# Altium PCB PCB1.PcbDoc
Units mm, origin at the board's own origin, x right, y up, seen from the top; angles counter-clockwise.
Board outline 49.28 x 64.77 mm, 2 copper layers (Top Layer, Bottom Layer); 24 components, 17 nets, 77 pads, 1 vias.
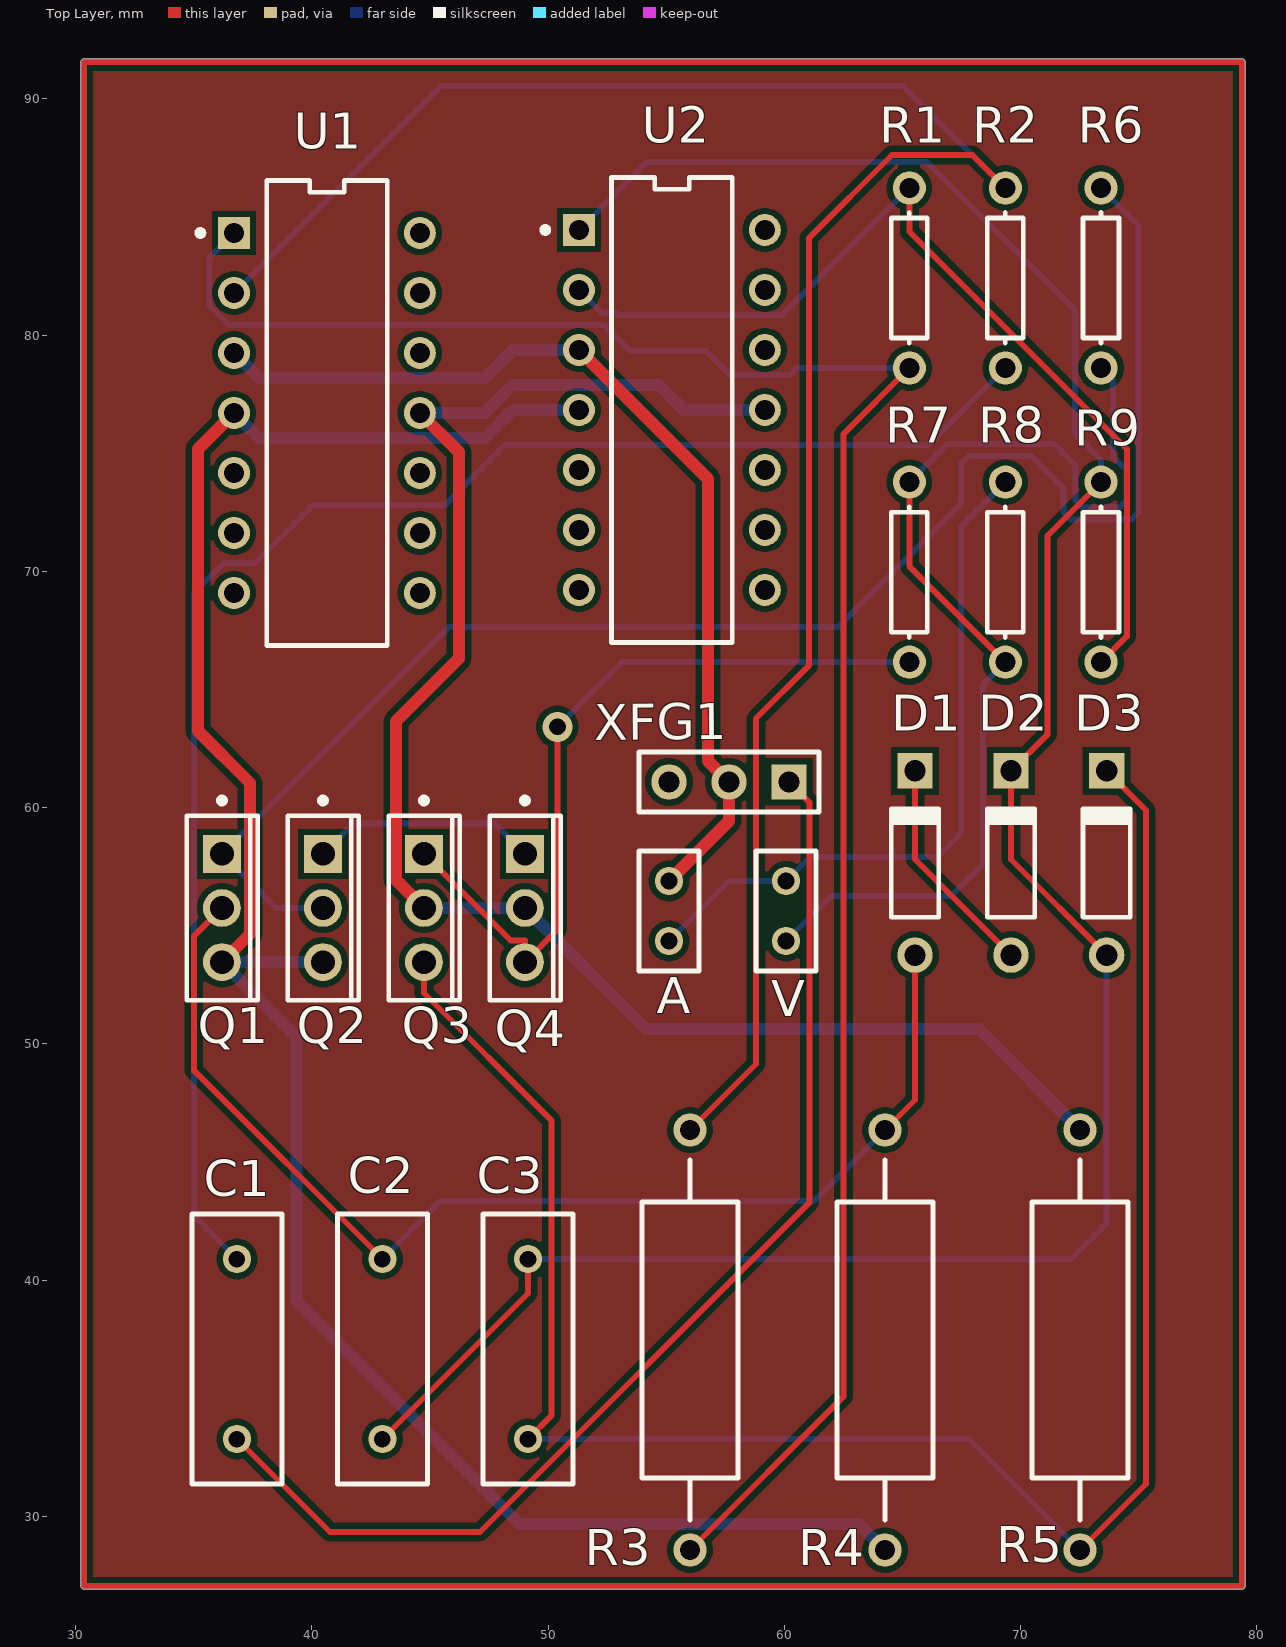
[diagram p0: Top Layer view]
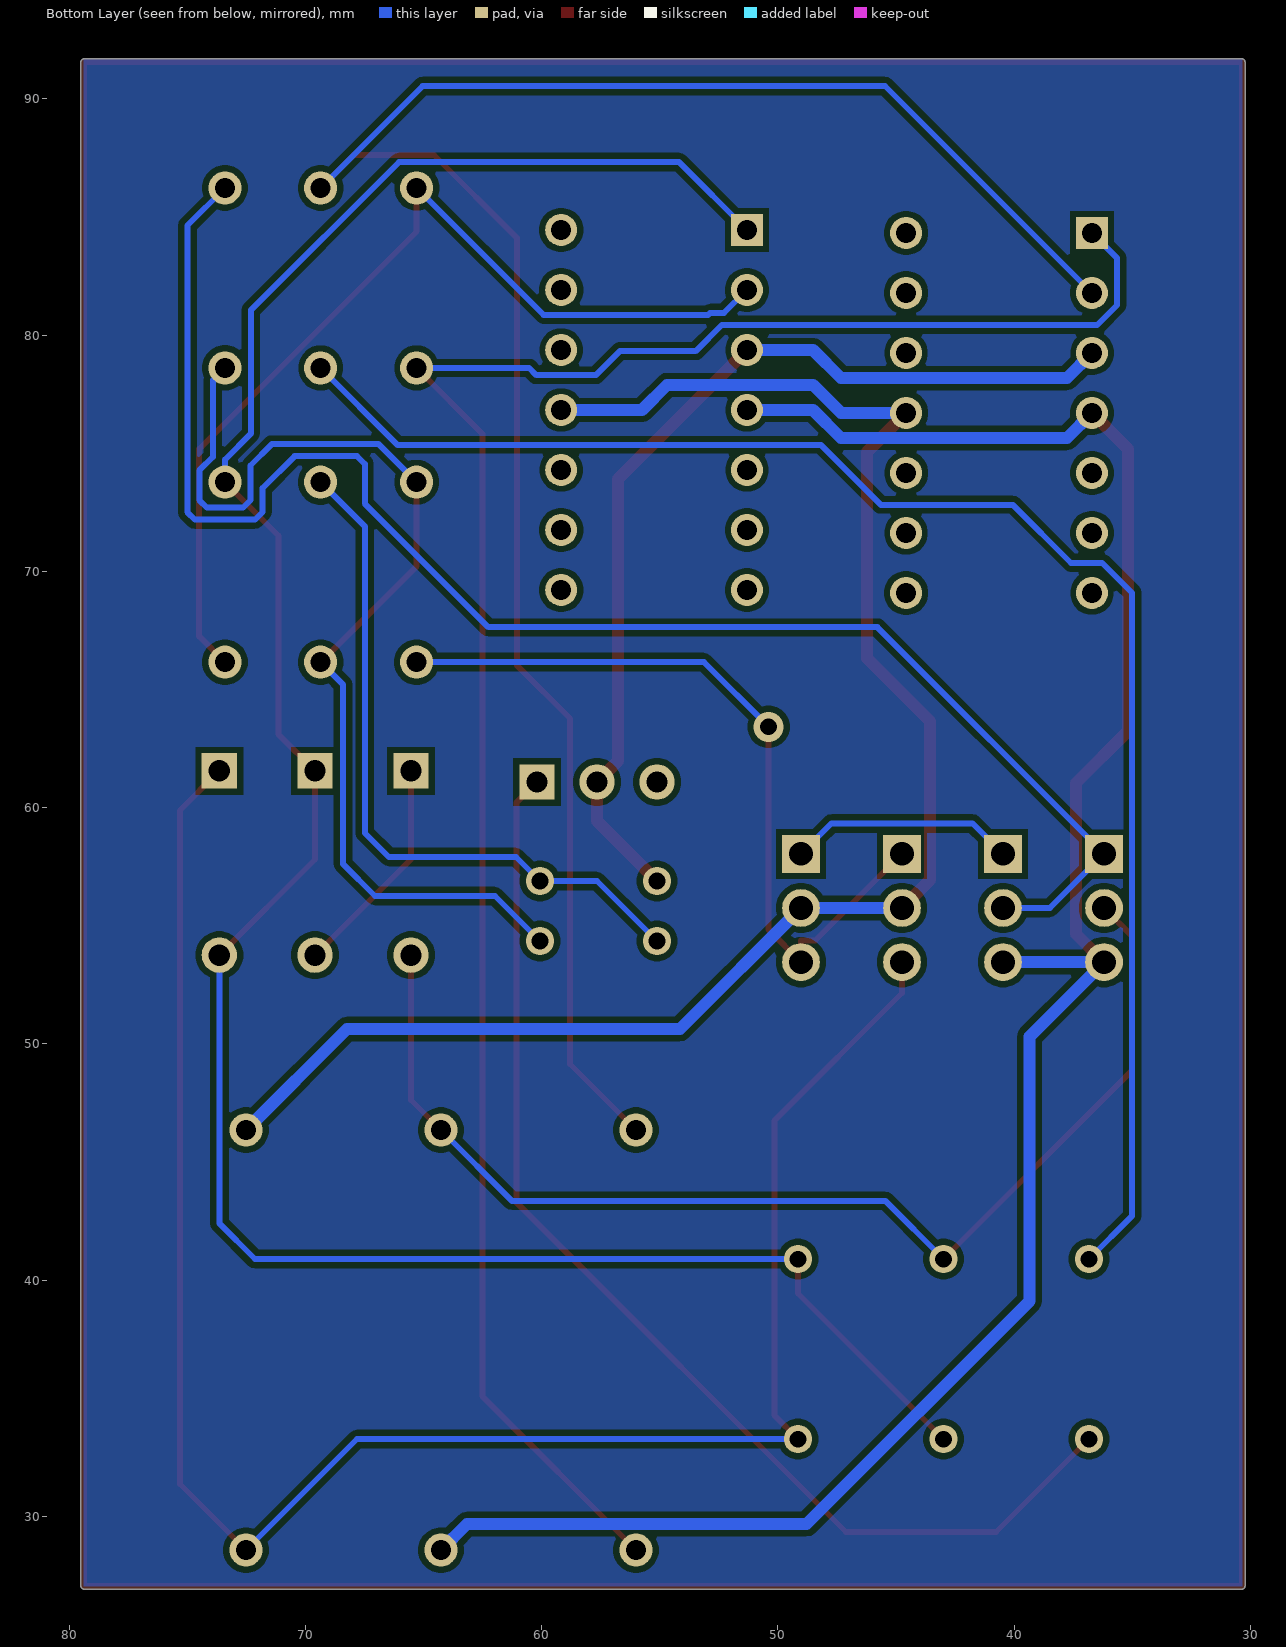
[diagram p1: Bottom Layer view, seen from below]

## Layer stack, top to bottom
Top Solder: solder mask 0.0102, Solder Resist, Dk 3.5
Top Layer: signal copper 0.0356
Dielectric 1: dielectric 0.32, FR-4, Dk 4.8
Bottom Layer: signal copper 0.0356
Bottom Solder: solder mask 0.0102, Solder Resist, Dk 3.5

## Board outline
30.226,27.051 ccw(c30.353,27.051) 30.353,26.924 79.375,26.924 ccw(c79.375,27.051) 79.502,27.051 79.502,91.567 ccw(c79.375,91.567) 79.375,91.694 30.353,91.694 ccw(c30.353,91.567) 30.226,91.567

## Design rules (kind name [scope] priority, off if disabled: settings)
Clearance Clearance_1 [OnMid vs OnMid] p1: gap=0.254 ignorepadtopadclearanceinfootprint=FALSE sourcerule=36 cellrowname=All cellrowtype=0 cellcolname=All cellcoltype=0 innerlayers=TRUE
Clearance Clearance_2 [(ExistsOnLayer('Top Layer') Or ExistsOnLayer('Bottom Layer')) vs (ExistsOnLayer('Top Layer') Or ExistsOnLayer('Bottom Layer'))] p2: gap=0.254 ignorepadtopadclearanceinfootprint=FALSE sourcerule=36 cellrowname=All cellrowtype=0 cellcolname=All cellcoltype=0 outerlayers=TRUE
Clearance [All] p3: gap=0.254 ignorepadtopadclearanceinfootprint=FALSE ismatrix=TRUE
PolygonConnect [All] p1: connectstyle=Relief reliefconductorwidth=0.254 reliefentries=4 polygonreliefangle="90 Angle" airgapwidth=0.254
RoutingVias [All] p1: holewidth=0.711 width=1.27 viastyle="Through Hole" minholewidth=0.711 minwidth=1.27 maxholewidth=0.711 maxwidth=1.27
SolderMaskExpansion [All] p1: expansion=0.102 istentingtop=FALSE
Width [All] p1: maxlimit=0.254 minlimit=0.254 preferedwidth=0.254
30 further rules are at their usual default settings.

## Classes and differential pairs
net class PWR: -12V GND VCC

## Components (designator, comment, footprint, x,y, rotation, side; value= is the part's Value field where it differs from the comment)
A "Meter" RAD-0.1 55.118,55.626 r90 top
C1 "" RAD-0.3 36.83,37.084 r90 top value=1μF
C2 "Cap" RAD-0.3 42.989,37.084 r90 top value=0.1μF
C3 "Cap" RAD-0.3 49.149,37.084 r90 top value=0.1μF
D1 "Diode 1N4149" DO-35A 65.532,57.658 r90 top
D2 "Diode 1N4149" DO-35A 69.596,57.658 r90 top
D3 "Diode 1N4149" DO-35A 73.644,57.658 r90 top
Q1 "BD787G" ONSC-TO-225-3-77-09 36.195,55.753 r0 top
Q2 "BD787G" ONSC-TO-225-3-77-09 40.471,55.753 r0 top
Q3 "BD788G" ONSC-TO-225-3-77-09 44.746,55.753 r0 top
Q4 "BD788G" ONSC-TO-225-3-77-09 49.022,55.753 r0 top
R1 "Res1" AXIAL-0.3 65.294,82.423 r90 top value=3kΩ
R2 "" AXIAL-0.3 69.358,82.423 r90 top value=1kΩ
R3 "Key=C" AXIAL-0.7 56.007,37.465 r90 top value="10kΩ  50%"
R4 "Key=A" AXIAL-0.7 64.262,37.465 r90 top value="4.7kΩ  80%"
R5 "Key=B" AXIAL-0.7 72.517,37.465 r90 top value="4.7kΩ  80%"
R6 "Res1" AXIAL-0.3 73.406,82.423 r90 top value=560Ω
R7 "Res1" AXIAL-0.3 65.294,69.971 r90 top value=560Ω
R8 "Res1" AXIAL-0.3 69.358,69.971 r90 top value=8Ω
R9 "Res1" AXIAL-0.3 73.406,69.971 r90 top value=3kΩ
U1 "741" FP-N-14-MFG 40.64,76.708 r0 top
U2 "741" FP-N-14-MFG 55.243,76.835 r0 top
V "Meter" RAD-0.1 60.071,55.626 r90 top
XFG1 "Header 3" HDR1X3 60.198,61.087 r180 top

## Footprints (in the part's own frame and the unit in brackets; to place one, negate y for a bottom-side part, rotate by r counter-clockwise, add the part's x,y. Pads: shape width x height; smd on the part's side, far side on the other; paste and mask are expansions set on the pad)
AXIAL-0.3 [mm] "Axial Device, Thru-Hole; 2 Leads; 0.3 in Pin Spacing"
  round 1.4 hole 0.85: 1(-3.81,0) 2(3.81,0)
  silkscreen extent -2.77,-0.76 2.77,0.76
AXIAL-0.7 [mm] "Axial Device, Thru-Hole; 2 Leads; 0.7 in Pin Spacing"
  round 1.4 hole 0.85: 1(-8.89,0) 2(8.89,0)
  silkscreen extent -7.62,-2.03 7.62,2.03
DO-35A [mm] "Diode, Axial; Body 4.6 x 1.9 mm (LxDia. max), Lead Dia. 0.53 mm (max)"
  round 1.5 hole 0.9: 1(-3.9,0)
  rect 1.5x1.5 hole 0.9: 2(3.9,0)
  silkscreen extent -2.3,-1 2.4,1
FP-N-14-MFG [mm]
  rect 1.35x1.35 hole 0.85 paste-2539.97 mask+0: 1(-3.935,7.62)
  round 1.35 hole 0.85 paste-2539.97 mask+0: 2(-3.935,5.08) 3(-3.935,2.54) 4(-3.935,0) 5(-3.935,-2.54) 6(-3.935,-5.08) 7(-3.935,-7.62) 8(3.935,-7.62) 9(3.935,-5.08) 10(3.935,-2.54) 11(3.935,0) 12(3.935,2.54) 13(3.935,5.08) 14(3.935,7.62)
  silkscreen extent -5.48,-9.84 2.55,9.84, body extent -4.71,-9.94 4.71,9.94, height 0.25
HDR1X3 [mm] "Connector; Header; 3 Position"
  rect 1.5x1.5 hole 0.9: 1(0,0)
  round 1.5 hole 0.9: 2(2.54,0) 3(5.08,0)
  silkscreen extent -1.27,-1.27 6.35,1.27
ONSC-TO-225-3-77-09 [mm] "FM, 3-Leads, Body 7.8x3mm, Pitch 2.29mm"
  rect 1.6x1.6 hole 1: 1(0,2.29)
  round 1.6 hole 1: 2(0,0) 3(0,-2.29)
  silkscreen extent -1.49,-3.9 1.51,4.67, body extent -1.49,-3.9 1.51,3.9, height 13.64
RAD-0.1 [mm] "Radial Cap, Thru-Hole; 2 Leads; 0.1 in Pin Spacing"
  round 1.2 hole 0.7: 1(-1.27,0) 2(1.27,0)
  silkscreen extent -2.54,-1.27 2.54,1.27
RAD-0.3 [mm] "Radial Cap, Thru-Hole; 2 Leads; 0.3 in Pin Spacing"
  round 1.2 hole 0.7: 1(-3.81,0) 2(3.81,0)
  silkscreen extent -5.71,-1.91 5.71,1.91

## Part data
A V: "Indicating Instrument", LatestRevisionDate=17-Jul-2002, LatestRevisionNote="Re-released for DXP Platform.", Note="Place a \"letter\" into the symbol to show the function of the meter or instrument", PackageDescription="Radial Cap, Thru-Hole; 2 Leads; 0.1 in Pin Spacing", PackageReference=RAD-0.1, Published=24-Mar-1999, Publisher="Altium Limited"
C1: library part Cap, "Capacitor", LatestRevisionDate=17-Jul-2002, LatestRevisionNote="Re-released for DXP Platform.", PackageDescription="Radial Cap, Thru-Hole; 2 Leads; 0.3 in Pin Spacing", PackageReference=RAD-0.3, Published=8-Jun-2000, Publisher="Altium Limited"
C2 C3: "Capacitor", LatestRevisionDate=17-Jul-2002, LatestRevisionNote="Re-released for DXP Platform.", PackageDescription="Radial Cap, Thru-Hole; 2 Leads; 0.3 in Pin Spacing", PackageReference=RAD-0.3, Published=8-Jun-2000, Publisher="Altium Limited"
D1 D2 D3: "Computer Diode", Code_JEDEC=DO-204-AH, ComponentLink1Description="Manufacturer Link", ComponentLink1URL=http://www.national.com/, DatasheetVersion=1989, LatestRevisionDate=17-Jul-2002, LatestRevisionNote="Re-released for DXP Platform.", PackageDescription="Diode, Axial; Body 4.6 x 1.9 mm (LxDia. max), Lead Dia. 0.53 mm (max)", PackageReference=DO-35A, PackageVersion=1989, Published=8-Jun-2000, Publisher="Altium Limited"
Q1 Q2: library part CMP-013-00034-1, "BD Series 60 V 4 A PNP Complementary Plastic Silicon Power Transistor TO-220 AB", Case/Package=TO-225-3, Frequency=50MHz, Max Operating Temperature=150°C, Min Operating Temperature=-65°C, RoHS Compliant=Yes
Q3 Q4: library part CMP-1048-01246-1, "Complementary Plastic Silicon Power Transistor, 3-Pin TO-225, Pb-Free, Bulk Box", Manufacturer="On Semiconductor", ComponentLink1Description="Manufacturer URL", ComponentLink1URL=http://www.onsemi.com/, ComponentLink2Description=Datasheet, ComponentLink2URL=http://www.onsemi.cn/pub_link/Collateral/BD787-D.PDF, ComponentLink3Description="Package Specification", ComponentLink3URL=http://www.onsemi.com/pub_link/Collateral/77-09.PDF, DatasheetVersion="Rev. 12", fT Min (MHz)=50, IC Continuous (A)=4, Mounting Technology="Through Hole", PackageDescription="3-Pin Flange Mount, Vertical Straight Lead, Body 7.6 x 2.7 mm, Pitch 2.29 mm", PackageReference=TO-225-3-77-09, PackageVersion="Rev. AC, 12/2013", Packing="Bulk Box", PartNumber=BD788G, Polarity=PNP, RoHS=TRUE
R1 R6 R7 R8 R9: "Resistor", LatestRevisionDate=17-Jul-2002, LatestRevisionNote="Re-released for DXP Platform.", PackageDescription="Axial Device, Thru-Hole; 2 Leads; 0.3 in Pin Spacing", PackageReference=AXIAL-0.3, Published=8-Jun-2000, Publisher="Altium Limited"
R2: library part Res1, "Resistor", LatestRevisionDate=17-Jul-2002, LatestRevisionNote="Re-released for DXP Platform.", PackageDescription="Axial Device, Thru-Hole; 2 Leads; 0.3 in Pin Spacing", PackageReference=AXIAL-0.3, Published=8-Jun-2000, Publisher="Altium Limited"
R3 R4 R5: library part "Res Adj1", "Variable Resistor", LatestRevisionDate=17-Jul-2002, LatestRevisionNote="Re-released for DXP Platform.", PackageDescription="Axial Device, Thru-Hole; 2 Leads; 0.7 in Pin Spacing", PackageReference=AXIAL-0.7, Published=8-Jun-2000, Publisher="Altium Limited", Set Position=0.5
U1 U2: library part CMP-09116-000067-1, "IC OPAMP GP 4 CIRCUIT 14DIP", Case/Package=PDIP, Input Bias Current=300nA, Input Offset Voltage (Vos)=500uV, Max Dual Supply Voltage=22V, Max Operating Temperature=70°C, Min Operating Temperature=0°C, Package Quantity=25, Power Supply Rejection Ratio (PSRR)=107.96dB, Voltage Gain=116.26dB, Amplifier Type="GENERAL PURPOSE", Bandwidth=3MHz, Common Mode Rejection Ratio=100dB, Height=3.3mm, Lead Free="Contains Lead", Length=19.05mm, Mount="Through Hole", Number of Amplifiers=4, Number of Channels=4, Number of Circuits=4, Number of Elements=4, Number of Pins=14, Packaging=Rail/Tube, Radiation Hardening=No, REACH SVHC="No SVHC", RoHS Compliant=Yes, Series=-, Slew Rate=1V/µs, Technology=BIPOLAR, Width=6.35mm
XFG1: "Header, 3-Pin", LatestRevisionDate=17-Jul-2002, LatestRevisionNote="Re-released for DXP Platform.", Publisher="Altium Limited"

## Via types
v1: diameter 1.27, hole 0.711, Top Layer to Bottom Layer, 1 vias

## Nets (pads, with @x,y where several pads share a name; then routed paths per layer and width w, separated by ;. In a path a pad name is that pad's centre, name@x,y a point inside that pad or via, vN(x,y) a via of type N, cw(c..) or ccw(c..) an arc to the next point about the centre after c; other vN are vias at no path point)
-12V: Q3.2 Q4.2 R5.2 U1.11 U2.11 | length 70.4
  Top Layer w0.508: U1.11 46.228,75.055 46.228,66.319 43.561,63.652 43.561,56.938 Q3.2
  Bottom Layer w0.508: U1.11 47.32,76.708 48.514,77.902 54.686,77.902 55.753,76.835 U2.11 ; Q3.2 Q4.2 54.153,50.622 68.25,50.622 R5.2
GND: A.2 U1.3 U2.3 XFG1.2 | length 41.7
  Top Layer w0.508: U2.3 56.769,73.914 56.769,61.976 XFG1.2 57.658,59.436 A.2
  Bottom Layer w0.508: U1.3 37.772,78.181 47.32,78.181 48.514,79.375 U2.3
NetA_1: A.1 R8.2 V.2 | length 29.9
  Bottom Layer w0.254: A.1 57.658,56.896 V.2 61.087,57.912 66.472,57.912 67.488,58.928 67.488,71.91 R8.2
NetC1_1: C1.1 XFG1.1 | length 49.8
  Top Layer w0.254: C1.1 40.767,29.337 47.117,29.337 61.062,43.282 61.062,60.223 XFG1.1
NetC1_2: C1.2 R2.1 | length 67.3
  Bottom Layer w0.254: C1.2 35.001,42.723 35.001,69.088 36.271,70.358 37.592,70.358 40.056,72.822 45.644,72.822 48.184,75.362 66.107,75.362 R2.1
NetC2_1: C2.1 C3.2 D2.2 D3.1 R9.2 U2.1 | length 102.4
  Top Layer w0.254: C2.1 49.149,39.433 C3.2 ; R9.2 71.145,71.52 71.145,63.107 D2.2 69.596,57.806 D3.1
  Bottom Layer w0.254: C3.2 72.136,40.894 73.644,42.402 D3.1 ; U2.1 54.178,87.325 66.04,87.325 72.307,81.058 72.307,75.833 73.406,74.735 R9.2
NetC2_2: C2.2 D1.1 Q1.2 R4.2 | length 50.1
  Top Layer w0.254: Q1.2 35.001,54.559 35.001,48.882 C2.2 ; R4.2 65.532,47.625 D1.1
  Bottom Layer w0.254: C2.2 45.453,43.358 61.265,43.358 R4.2
NetC3_1: C3.1 D3.2 Q3.3 R5.1 | length 83
  Top Layer w0.254: Q3.3 44.746,52.155 50.14,46.761 50.14,34.265 C3.1 ; R5.1 75.311,31.369 75.311,59.891 D3.2
  Bottom Layer w0.254: C3.1 67.818,33.274 R5.1
NetD1_2: D1.2 D2.1 | length 9.5
  Top Layer w0.254: D1.2 65.532,57.822 D2.1
NetQ1_1: Q1.1 Q2.2 R6.2 | length 68.2
  Bottom Layer w0.254: Q2.2 38.485,55.753 Q1.1 45.792,67.64 62.255,67.64 67.488,72.873 67.488,74.549 67.818,74.879 70.46,74.879 71.817,73.522 71.817,72.51 72.136,72.191 74.676,72.191 74.995,72.51 74.995,84.644 R6.2
NetQ2_1: Q2.1 Q4.1 | length 9.6
  Bottom Layer w0.254: Q2.1 41.762,59.334 47.731,59.334 Q4.1
NetQ3_1: Q3.1 Q4.3 R7.1 | length 33.3
  Top Layer w0.254: Q3.1 48.408,54.381 49.022,54.381 Q4.3 50.394,54.835 v1(50.394,63.424)
  Bottom Layer w0.254: v1(50.394,63.424) 53.13,66.16 R7.1
NetR1_1: R1.1 R3.1 U1.1 | length 88.4
  Top Layer w0.254: R3.1 62.509,35.077 62.509,75.828 R1.1
  Bottom Layer w0.254: U1.1 35.636,83.259 35.636,81.28 36.485,80.431 52.375,80.431 53.482,79.324 56.693,79.324 57.709,78.308 60.223,78.308 60.528,78.613 R1.1
NetR1_2: R1.2 R9.1 U2.2 | length 41
  Top Layer w0.254: R1.2 65.294,84.388 74.498,75.184 74.498,67.253 R9.1
  Bottom Layer w0.254: U2.2 52.284,80.939 52.872,80.939 52.952,80.859 59.92,80.859 R1.2
NetR2_2: R2.2 R3.2 U1.2 | length 88.3
  Top Layer w0.254: R3.2 58.801,49.149 58.801,63.779 61.036,66.015 61.036,84.109 64.557,87.63 67.961,87.63 R2.2
  Bottom Layer w0.254: U1.2 45.468,90.551 65.04,90.551 R2.2
NetR6_1: R6.1 R7.2 R8.1 V.1 | length 45.9
  Top Layer w0.254: R7.2 65.294,70.224 R8.1
  Bottom Layer w0.254: V.1 61.976,56.261 67.056,56.261 68.402,57.607 68.402,65.205 R8.1 ; R7.2 66.901,75.387 71.425,75.387 72.325,74.487 72.325,73.018 72.644,72.699 74.168,72.699 74.487,73.018 74.487,74.281 73.914,74.854 73.914,78.105 R6.1
VCC: Q1.3 Q2.3 R4.1 U1.4 U2.4 | length 90
  Top Layer w0.508: Q1.3 37.389,54.657 37.389,61.036 35.179,63.246 35.179,75.182 U1.4
  Bottom Layer w0.508: U1.4 37.772,75.641 47.32,75.641 48.514,76.835 U2.4 ; Q2.3 Q1.3 39.345,50.313 39.345,39.116 48.793,29.667 63.17,29.667 R4.1
pads on no net: U1.5 U1.6 U1.7 U1.8 U1.9 U1.10 U1.12 U1.13 U1.14 U2.5 U2.6 U2.7 U2.8 U2.9 U2.10 U2.12 U2.13 U2.14 XFG1.3
copper on no net: | length 227.1
  Top Layer w0.254: 30.353,27.051 79.375,27.051 79.375,91.567 30.353,91.567 30.353,27.051

## Polygon pours and split planes (outlines as drawn)
no net on Bottom Layer "NONET_L02_P001" (solid, pour order 1): 30.353,91.694 30.353,27.051 79.375,27.051 79.375,91.694
no net on Top Layer "NONET_L01_P000" (solid, pour order 0): 30.353,91.567 30.353,27.051 79.375,27.051 79.375,91.567